# Allegro board motor_encoder_brd.brd
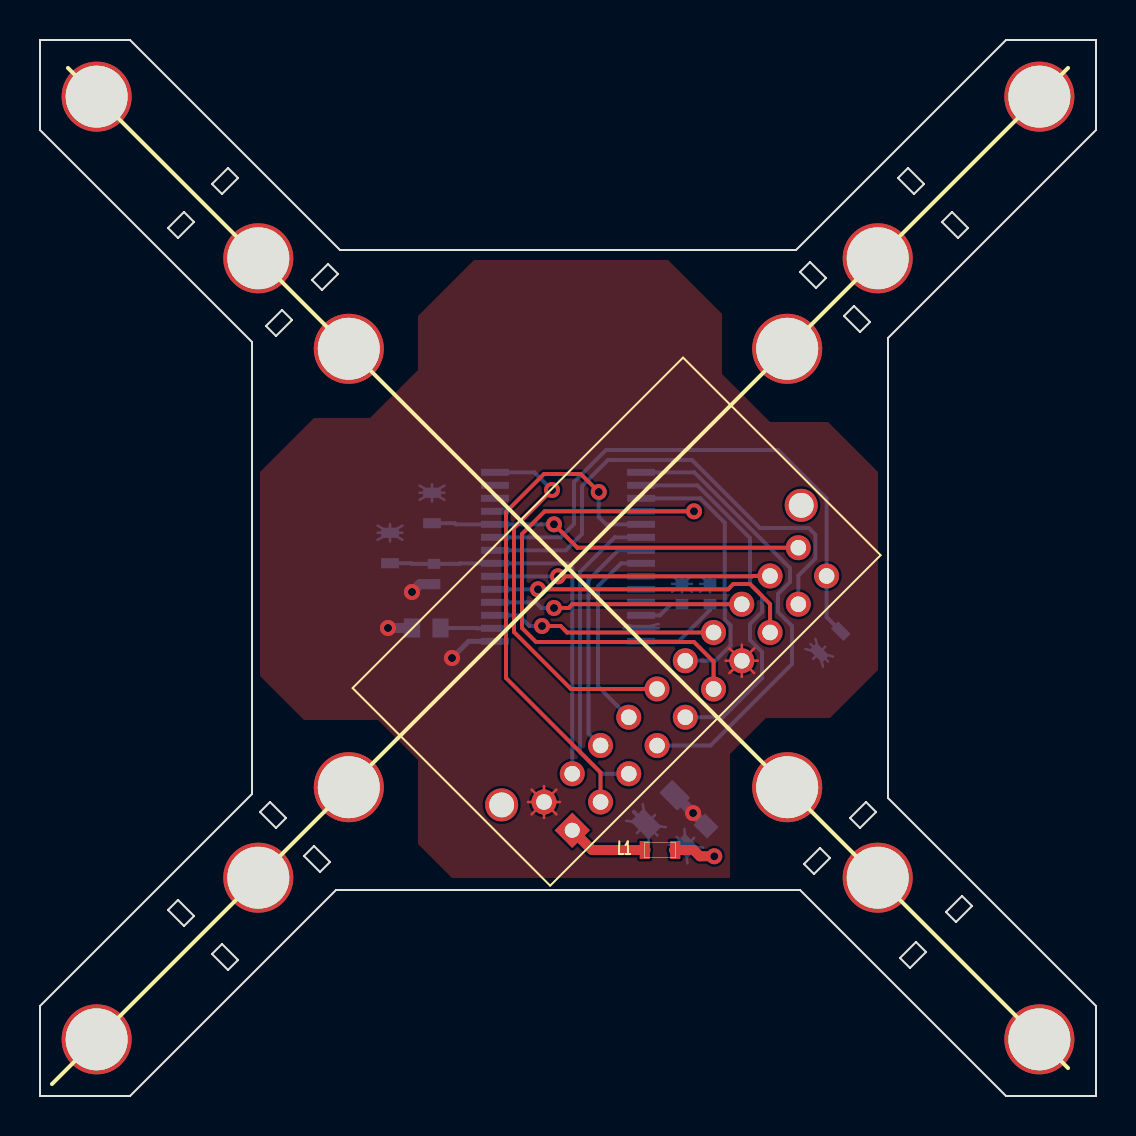
[diagram p0: board, top side]
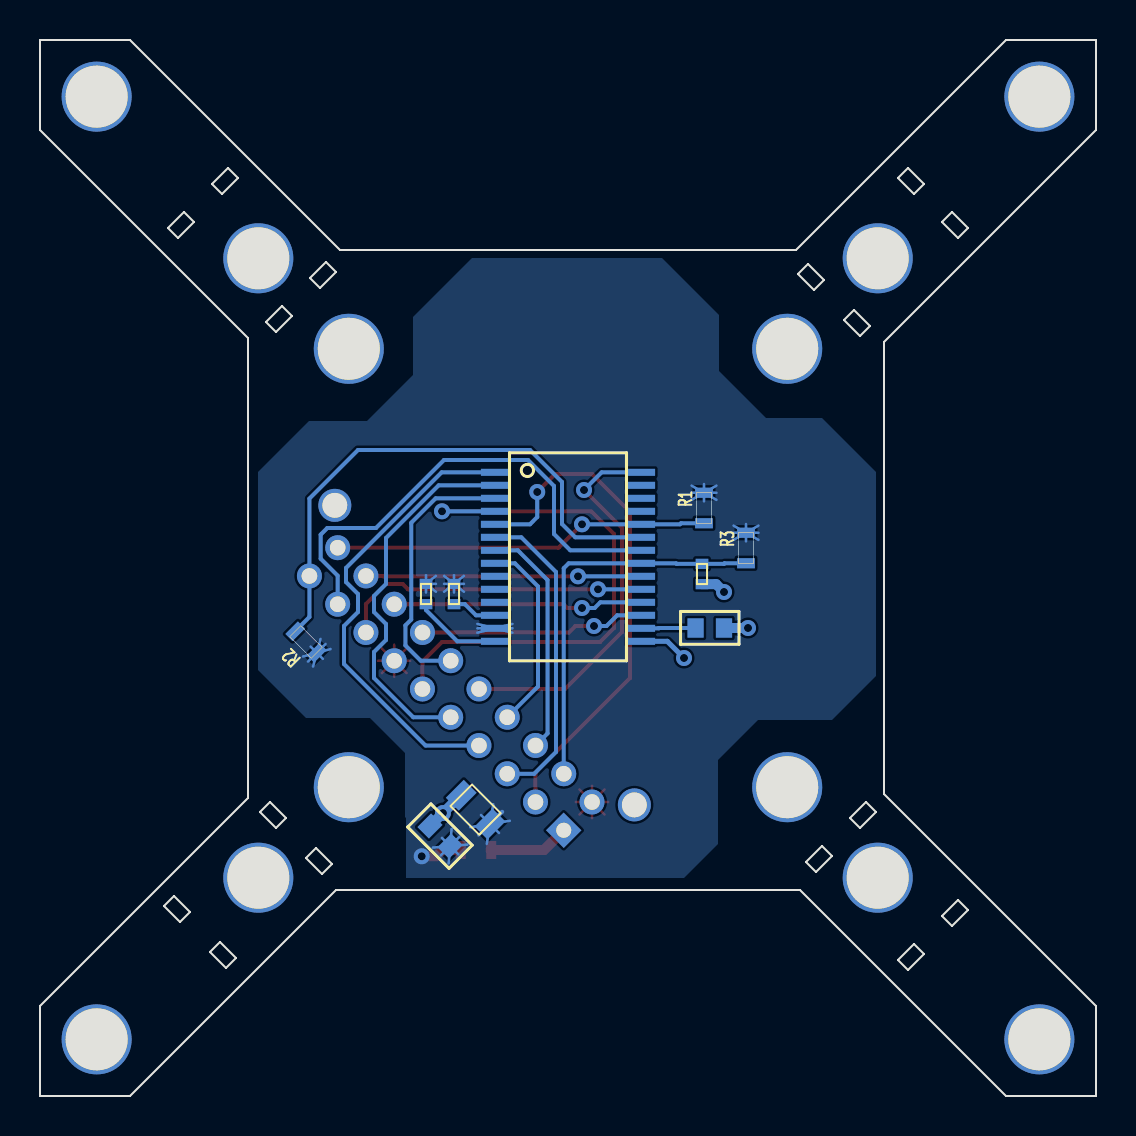
[diagram p1: board, bottom side, seen from below]

Outline 52.8 x 52.8 mm; copper layers: TOP, BOTTOM. Coordinates in mm from the lower left corner of the outline.
Outline path: 0,52.8 0,48.3 ; 0,52.8 0,48.3 ; 0,52.8 4.5,52.8 ; 0,52.8 4.5,52.8 ; 0,48.3 10.6,37.7 ; 0,48.3 10.6,37.7 ; 10.6,37.7 10.6,15.1 ; 10.6,37.7 10.6,15.1 ; 0,4.5 0,0 ; 0,4.5 0,0 ; 0,4.5 10.6,15.1 ; 0,4.5 10.6,15.1 ; 0,0 4.5,0 ; 0,0 4.5,0 ; 4.5,0 14.8,10.3 ; 4.5,0 14.8,10.3 ; 4.5,52.8 15,42.3 ; 4.5,52.8 15,42.3 ; 14.8,10.3 38,10.3 ; 14.8,10.3 38,10.3 ; 38,10.3 48.3,0 ; 38,10.3 48.3,0 ; 15,42.3 37.8,42.3 ; 15,42.3 37.8,42.3 ; 37.8,42.3 48.3,52.8 ; 37.8,42.3 48.3,52.8 ; 48.3,0 52.8,0 ; 48.3,0 52.8,0 ; 42.4,37.9 52.8,48.3 ; 42.4,37.9 52.8,48.3 ; 42.4,37.9 42.4,14.9 ; 42.4,37.9 42.4,14.9 ; 52.8,48.3 52.8,52.8 ; 52.8,48.3 52.8,52.8 ; 42.4,14.9 52.8,4.5 ; 42.4,14.9 52.8,4.5 ; 48.3,52.8 52.8,52.8 ; 48.3,52.8 52.8,52.8 ; 52.8,0 52.8,4.5 ; 52.8,0 52.8,4.5 ; 6.4,43.4 7.2,44.2 7.7,43.7 6.9,42.9 6.4,43.4 ; 6.4,9.3 6.9,9.8 7.7,9 7.2,8.5 6.4,9.3 ; 8.6,45.6 9.4,46.4 9.9,45.9 9.1,45.1 8.6,45.6 ; 8.6,7.1 9.1,7.6 9.9,6.8 9.4,6.3 8.6,7.1 ; 11,14.2 11.5,14.7 12.3,13.9 11.8,13.4 11,14.2 ; 11.3,38.5 12.1,39.3 12.6,38.8 11.8,38 11.3,38.5 ; 13.2,12 13.7,12.5 14.5,11.7 14,11.2 13.2,12 ; 13.6,40.8 14.4,41.6 14.9,41.1 14.1,40.3 13.6,40.8 ; 38,41.2 38.5,41.7 39.3,40.9 38.8,40.4 38,41.2 ; 38.2,11.6 39,12.4 39.5,11.9 38.7,11.1 38.2,11.6 ; 40.2,39 40.7,39.5 41.5,38.7 41,38.2 40.2,39 ; 40.5,13.9 41.3,14.7 41.8,14.2 41,13.4 40.5,13.9 ; 42.9,45.9 43.4,46.4 44.2,45.6 43.7,45.1 42.9,45.9 ; 43,6.9 43.8,7.7 44.3,7.2 43.5,6.4 43,6.9 ; 45.1,43.7 45.6,44.2 46.4,43.4 45.9,42.9 45.1,43.7 ; 45.3,9.2 46.1,10 46.6,9.5 45.8,8.7 45.3,9.2

## Design rules (mm)
constraint set DEFAULT: min track width 0.127
net group DP_A: nets A W/NCOS
net group DP_B: nets B RI

## Placement (name value [footprint] x y rotation side)
BR1  CIRCUIT BREAKER  [CAP0402]  19.7 26.1 90 bottom
BR2  CIRCUIT BREAKER  [CAP0402]  32.1 25.1 270 bottom
BR3  CIRCUIT BREAKER  [CAP0402]  33.5 25.1 270 bottom
C1  100n  [SMC0603]  18.6 23.4 0 bottom
C2  100n  [SMC0603]  33.3 13.5 225 bottom
C3  10u  [CAP0805]  30.3 13.6 45 bottom
J1  S20B-PADSS-1(LF)(SN)  [JST_PADSS_90DEG_10X2]  25.2 14.7 45 top
L1  BLM18PG300SN1D  [RES0603]  31 12.3 180 top
NOREF  -  [unnamed]  37.36 37.36 0 top
NOREF#2  -  [unnamed]  15.44 37.36 0 top
NOREF#3  -  [#2]  0 52.8 0 top
NOREF#4  -  [unnamed]  49.97 49.97 0 top
NOREF#5  -  [unnamed]  2.83 49.97 0 top
NOREF#6  -  [#2]  2.83 2.83 0 top
NOREF#7  -  [#2]  10.91 10.91 0 top
NOREF#8  -  [#2]  44.9 38.12 0 top
NOREF#9  -  [#2]  53.09 46.37 0 top
NOREF#10  -  [#2]  41.04 31.48 0 top
NOREF#11  -  [#2]  15.44 15.44 90 top
NOREF#12  -  [unnamed]  10.91 10.91 0 top
NOREF#13  -  [unnamed]  49.97 2.83 0 top
NOREF#14  -  [#2]  2.83 2.83 90 top
NOREF#15  -  [unnamed]  2.83 2.83 0 top
NOREF#16  -  [unnamed]  10.91 41.89 0 top
NOREF#17  -  [unnamed]  37.36 15.44 0 top
NOREF#18  -  [unnamed]  41.89 10.91 0 top
NOREF#19  -  [#2]  15.44 15.44 0 top
NOREF#20  -  [#2]  52.8 0 90 top
NOREF#21  -  [#2]  10.91 10.91 90 top
NOREF#22  -  [#2]  38 10.3 90 top
NOREF#23  -  [unnamed]  41.89 41.89 0 top
NOREF#24  -  [#2]  2.83 49.97 0 top
NOREF#25  -  [unnamed]  15.44 15.44 0 top
R1  51k  [RES0603]  19.6 29.4 90 bottom
R2  51k  [RES0603]  39.5 22.7 225 bottom
R3  51k  [RES0603]  17.5 27.4 90 bottom
U1  AM4096  [SSOP28-LD]  26.4 26.96 270 bottom

## Library data of the parts
BR1-BR3 = CIRCUIT BREAKER_0
C1 = C: signal model: DEFAULT_CAPACITOR_100000pF_2_1
C2 = C: signal model: capacitor20pF
C3 = C_elect_0: signal model: DEFAULT_CAPACITOR_1e+07pF_2_1
J1 = HEADER 10X2
L1 = CHOKE HASH-IRON: signal model: cable_espice
R1-R3 = R: signal model: DEFAULT_RESISTOR_51000OHM_2_1
U1 = AM4096: signal model: CDS_lvds_device

## Footprints (pads in the part's own frame, mm; a bottom-side part is the same pattern mirrored in y, then rotated)
CAP0402
  rect 0.508x0.635 smd: 1(-0.508,0) 2(0.508,0)
CAP0805
  rect 0.914x1.27 smd: 1(0,0) 2(2.032,0)
JST_PADSS_90DEG_10X2
  round 1.65 hole 1.245: (-1.6,1.395) (19.582,1.395)
  rect 1.25x1.25 hole 0.75: 1(0,-2)
  round 1.25 hole 0.78: 2(0,0) 3(1.998,-2) 4(1.998,0) 5(3.996,-2) 6(3.996,0) 7(5.994,-2) 8(5.994,0) 9(7.992,-2) 10(7.992,0) 11(9.99,-2) 12(9.99,0) 13(11.988,-2) 14(11.988,0) 15(13.986,-2) 16(13.986,0) 17(15.984,-2) 18(15.984,0) 19(17.982,-2) 20(17.982,0)
RES0603
  rect 0.508x0.889 smd: 1(-0.762,0) 2(0.762,0)
SMC0603
  rect 0.813x0.965 smd: 1(0,0) 2(1.422,0)
SSOP28-LD
  rect 0.348x1.397 smd: 1(-4.225,-3.656) 2(-3.575,-3.656) 3(-2.925,-3.656) 4(-2.275,-3.656) 5(-1.625,-3.656) 6(-0.975,-3.656) 7(-0.325,-3.656) 8(0.325,-3.656) 9(0.975,-3.656) 10(1.625,-3.656) 11(2.275,-3.656) 12(2.925,-3.656) 13(3.575,-3.656) 14(4.225,-3.656) 15(4.225,3.656) 16(3.575,3.656) 17(2.925,3.656) 18(2.275,3.656) 19(1.625,3.656) 20(0.975,3.656) 21(0.325,3.656) 22(-0.325,3.656) 23(-0.975,3.656) 24(-1.625,3.656) 25(-2.275,3.656) 26(-2.925,3.656) 27(-3.575,3.656) 28(-4.225,3.656)
unnamed
  round 3.502 hole 3.1: 1(0,0)

## Nets
VIN: J1.1 L1.2
0: BR1.1 C1.1 C2.1 C3.2(-) J1.2 J1.13 U1.15
A: J1.11 U1.4
B: J1.12 U1.3
CLOCK: J1.10 U1.28
DATA: J1.7 U1.1
MAG: J1.14 U1.17
PSM: BR1.2 J1.4 R3.1 U1.21
REFN: J1.16 U1.18
REFP: J1.15 U1.19
RI: J1.9 U1.2
SCL: J1.20 R1.1 U1.24
SDA: J1.19 R2.1 U1.23
TD/PCOS: J1.8 U1.8
U/NSIN: J1.6 U1.7
V/PSIN: J1.5 U1.6
VEXT: BR2.1 BR3.1 C2.2 C3.1 L1.1 R1.2 R2.2 R3.2 U1.13
VOUT/TOUT: J1.18 U1.20
W/NCOS: J1.3 U1.5
ZERO: J1.17 U1.22(ZERO)
N01073: C1.2 U1.16
N03135: BR2.2 U1.12
N03141: BR3.2 U1.14

Pads without a net: NOREF 1; NOREF#2 1; NOREF#4 1; NOREF#5 1; NOREF#12 1; NOREF#13 1; NOREF#15 1; NOREF#16 1; NOREF#17 1; NOREF#18 1; NOREF#23 1; NOREF#25 1; U1 9 10 11 25 26 27

## Via types
v1: diameter 0.8, hole 0.4, TOP to BOTTOM, 13 vias

## Routing (per net, layer and track width the routed paths; a pad name or vN(x,y) marks a point on that pad's centre or on a via; arc(x,y) is an arc through that point)
VIN: length 4.1
  TOP w0.5: 30.28,12.3 L1.2 27.6,12.3 J1.1
0: length 20.6
  TOP w0.127: 34.47,21.14 J1.13 ; J1.13 34.29,21.76 ; J1.13 35.09,20.96 ; J1.13 35.89,21.76 ; J1.13 34.47,22.38 ; J1.13 35.09,22.57 ; J1.13 35.71,21.14 ; J1.13 35.71,22.38 ; J1.2 25.2,15.5 ; J1.2 25.82,15.32 ; J1.2 25.2,13.9 ; J1.2 26,14.7 ; J1.2 24.58,14.08 ; J1.2 25.82,14.08 ; J1.2 24.4,14.7 ; J1.2 24.58,15.32
  BOTTOM w0.25: v1(20.6,21.9) 21.43,22.73 U1.15
  BOTTOM w0.5: v1(18.6,25.2) 18.99,25.59 BR1.1 ; C3.2 32.07,14.7 32.1,14.7 v1(32.65,14.15) C2.1 ; C1.1 v1(17.4,23.4)
A: length 28.1
  TOP w0.2: v1(32.7,29.23) 25.23,29.23 24.1,28.1 24.1,23.4 24.8,22.7 32.7,22.7 33.68,21.72 J1.11
  BOTTOM w0.2: U1.4 v1(32.7,29.23)
B: length 13.5
  BOTTOM w0.2: J1.12 33.76,21.76 34.53,22.53 34.53,23.53 34.24,23.82 34.24,28.66 33.02,29.88 30.06,29.88
CLOCK: length 19.4
  TOP w0.2: J1.10 26.55,20.35 23.7,23.2 23.7,28.4 v1(25.6,30.3)
  BOTTOM w0.2: U1.28 24.71,31.18 v1(25.6,30.3)
DATA: length 23.2
  BOTTOM w0.2: J1.7 33.52,17.52 37.6,21.6 37.6,23.5 36.9,24.2 36.9,25.1 37.5,25.7 37.5,26.4 32.71,31.18 U1.1
MAG: length 11.3
  TOP w0.2: v1(25.1,23.5) 26.03,23.5 26.35,23.18 J1.14
  BOTTOM w0.2: v1(25.1,23.5) 24.47,23.5 23.94,24.03 U1.17
PSM: length 19.5
  BOTTOM w0.2: R3.1 18.57,26.64 18.6,26.61 BR1.2 20.97,26.61 21,26.63 26.36,26.63 26.61,26.39 J1.4
REFN: length 12.5
  TOP w0.2: v1(25.7,24.4) 26.43,24.4 26.62,24.59 J1.16
  BOTTOM w0.2: v1(25.7,24.4) 25.07,24.4 24.78,24.68 U1.18
REFP: length 15.7
  TOP w0.2: J1.15 36.5,24.6 35.5,25.6 34.66,25.6 34.4,25.33 v1(24.9,25.33)
  BOTTOM w0.2: 22.74,25.33 v1(24.9,25.33)
RI: length 18.9
  BOTTOM w0.2: U1.2 32.86,30.53 35.5,27.9 35.5,25.6 36.1,25 36.1,24.2 35.5,23.6 35.5,22.8 36.1,22.2 36.1,20.9 34.14,18.94 J1.9
SCL: length 18.8
  TOP w0.2: J1.20 26.87,27.42 v1(25.7,28.58)
  BOTTOM w0.2: v1(25.7,28.58) U1.24 20.8,28.58 20.75,28.64 R1.1
SDA: length 27.6
  BOTTOM w0.2: R2.1 39.33,23.95 J1.19 39.33,29.87 36.9,32.3 28.3,32.3 26.7,30.7 26.7,28.6 26.04,27.93 U1.23
TD/PCOS: length 9.8
  BOTTOM w0.2: J1.8 27.9,20.48 27.9,25.48 29.06,26.63 U1.8
U/NSIN: length 11.8
  BOTTOM w0.2: 30.06,27.29 28.91,27.29 27.42,25.8 27.42,18.13 J1.6
V/PSIN: length 15.7
  BOTTOM w0.2: U1.6 28.73,27.93 27,26.2 27,17.2 28.09,16.11 J1.5
VEXT: length 42.4
  TOP w0.5: 31.7,12.3 L1.1 32.68,12.3 33,11.99 v1(33.71,11.99)
  BOTTOM w0.127: R2.2 39.15,21.47 ; R2.2 38.27,22.35 ; R2.2 39.27,22.47 ; R2.2 38.77,22.85 ; R2.2 38.52,22.6 ; R2.2 39.65,21.97 ; R2.2 38.66,21.86 ; R2.2 39.4,21.72 ; 32.22,13.35 C2.2 ; C2.2 32.71,12.91 ; C2.2 32.37,11.63 ; C2.2 31.88,12.08 ; C2.2 31.43,12.57 ; C2.2 32.76,12.03 ; C2.2 31.83,12.96 ; C2.2 33.15,12.42 ; R1.2 20.22,30.52 ; R1.2 19.6,30.59 ; R1.2 18.98,29.81 ; R1.2 18.98,30.16 ; R1.2 20.22,29.81 ; R1.2 20.22,30.16 ; R1.2 19.6,29.73 ; R1.2 18.98,30.52 ; C3.1 31.29,13.44 ; C3.1 30.87,13.03 ; C3.1 29.85,13.15 ; C3.1 29.31,13.76 ; C3.1 30.46,12.61 ; C3.1 30.14,14.59 ; C3.1 30.75,14.05 ; R3.2 17.5,28.59 ; R3.2 16.88,28.16 ; R3.2 16.88,27.81 ; R3.2 17.5,27.73 ; R3.2 18.12,28.52 ; R3.2 16.88,28.52 ; R3.2 18.12,27.81 ; R3.2 18.12,28.16 ; BR2.1 32.6,25.21 ; BR2.1 32.1,26.04 ; BR2.1 32.6,25.61 ; BR2.1 31.6,25.61 ; BR2.1 31.6,25.21 ; BR2.1 32.1,25.18 ; BR2.1 32.6,26 ; BR2.1 31.6,26 ; 33,25.21 BR3.1 ; BR3.1 33.5,26.04 ; BR3.1 33,26 ; BR3.1 33.5,25.18 ; BR3.1 33,25.61 ; 30.06,23.38 30.93,23.38 ; 30.06,23.38 29.18,23.38 ; 30.06,23.38 30.93,23.17 ; 30.06,23.38 29.18,23.6 ; 30.06,23.38 30.93,23.6 ; 30.06,23.38 29.18,23.17
  BOTTOM w0.2: 29.69,14.21 C3.1
VOUT/TOUT: length 13.8
  TOP w0.2: v1(25.9,25.98) 35.63,25.98 35.65,26 J1.18
  BOTTOM w0.2: U1.20 v1(25.9,25.98)
W/NCOS: length 25.8
  TOP w0.2: v1(27.94,30.2) 27.04,31.1 25.2,31.1 23.3,29.2 23.3,20.9 28.03,16.17 J1.3
  BOTTOM w0.2: v1(27.94,30.2) 27.94,28.95 28.3,28.58 30.06,28.58
ZERO: length 24.7
  BOTTOM w0.2: U1.22 26.29,27.29 27.1,28.1 27.1,30.5 28.4,31.8 32.6,31.8 36,28.4 38.43,28.4 38.77,28.07 38.77,26.87 37.92,26.02 J1.17
N01073: length 2.7
  BOTTOM w0.2: C1.2 21.85,23.4 21.85,23.38 U1.16
N03135: length 2.3
  BOTTOM w0.2: U1.12 31,24.03 31.56,24.59 BR2.2
N03141: length 4.4
  BOTTOM w0.2: BR3.2 33.5,24.3 31.93,22.73 U1.14

## Copper pours and planes (outline as drawn; the poured copper is in the pictures)
0 on TOP: 11,31.2 11,21 13.2,18.8 16.9,18.8 18.9,16.8 18.9,12.6 20.6,10.9 34.5,10.9 34.5,17.1 36.3,18.9 39.5,18.9 41.9,21.3 41.9,31.2 39.4,33.7 36.5,33.7 34.1,36.1 34.1,39.1 31.4,41.8 21.7,41.8 18.9,39 18.9,36.3 16.5,33.9 13.7,33.9 ; 2 cut-outs
VEXT on BOTTOM: 11,31.2 11,21 13.2,18.8 16.9,18.8 18.9,16.8 18.9,12.6 20.6,10.9 34.5,10.9 34.5,13.9 34.55,13.95 34.55,17.15 36.3,18.9 39.5,18.9 41.9,21.3 41.9,31.2 39.35,33.75 36.45,33.75 34.15,36.05 34.15,38.95 31.2,41.9 21.7,41.9 18.85,39.05 18.85,36.25 16.5,33.9 13.7,33.9 ; 12 cut-outs
